# EAGLE board borrador_1 (EAGLE 9.5.2)

Size 200.33 x 299.71 mm. Coordinates in mm from the lower left corner, seen from the top.
Outline: 0,0 199.06,0 200.33,299.71 1.27,299.71 0,0
Copper layers (1*16): Top 0.035mm / dielectric 1.5mm / Bottom 0.035mm
Design rules "default": minimum track width 6mil, minimum drill 0.35mm, track to track 6mil, track to pad 6mil, pad to pad 6mil, via to via 6mil, smd to smd 6mil, copper to edge 40mil, drill to drill 6mil, minimum pad ring 10mil, minimum via ring 8mil, stop-mask expansion 4mil, vias tented up to drill 0mil, thermal gap 10mil

## Footprints (pad centres in the part's own frame; a part is rotated, then mirrored left to right if it is on the bottom)
DIP254P762X508-8 = drill 1.118 square: 1 -7.62,7.62 | drill 1.118: 2 -7.62,5.08; 3 -7.62,2.54; 4 -7.62,0; 5 0,0; 6 0,2.54; 7 0,5.08; 8 0,7.62
ESP32-DEVKITV1 = drill 1 pad 1.93: 3V3 0,0; D1 30.48,0; D2 7.62,0; D3 27.94,0; D4 10.16,0; D5 17.78,0; D12 7.62,25.4; D13 5.08,25.4; D14 10.16,25.4; D15 5.08,0; D16 12.7,0; D17 15.24,0; D18 20.32,0; D19 22.86,0; D21 25.4,0; D22 33.02,0; D23 35.56,0; D25 17.78,25.4; D26 15.24,25.4; D27 12.7,25.4; D32 22.86,25.4; D33 20.32,25.4; D34 27.94,25.4; D35 25.4,25.4; EN 35.56,25.4; GND 2.54,25.4; GND@1 2.54,0; VIN 0,25.4; VN 30.48,25.4; VP 33.02,25.4
SOT23 = smd 1 x 1.4: 1 -0.95,-1.1; 2 0.95,-1.1; 3 0,1.1
LED3MM = drill 0.813 pad 1.676 octagon: A -1.27,0 | drill 0.813 pad 1.676 square: K 1.27,0
MCP2515 = drill 0.813 long: 1 1.27,-6.35; 2 1.27,-3.81; 3 1.27,-1.27; 4 1.27,1.27; 5 1.27,3.81; 6 1.27,6.35; 7 1.27,8.89; 8 29.27,0; 9 29.27,2.54
ASUB27737TP25 = drill 1 pad 1.5: A1 49.86,0; A2 47.09,0; A3 44.32,0; A4 41.55,0; A5 38.78,0; A6 36.01,0; A7 33.24,0; A8 30.47,0; A9 27.7,0; A10 24.93,0; A11 22.16,0; A12 19.39,0; A13 16.62,0; A14 13.85,0; A15 11.08,0; A16 8.31,0; A17 5.54,0; A18 2.77,0; A19 0,0; A20 48.475,-2.84; A21 45.705,-2.84; A22 42.935,-2.84; A23 40.165,-2.84; A24 37.395,-2.84; A25 34.625,-2.84; A26 31.855,-2.84; A27 29.085,-2.84; A28 26.315,-2.84; A29 23.545,-2.84; A30 20.775,-2.84; A31 18.005,-2.84; A32 15.235,-2.84; A33 12.465,-2.84; A34 9.695,-2.84; A35 6.925,-2.84; A36 4.155,-2.84; A37 1.385,-2.84; B1 0,-6.8; B2 2.77,-6.8; B3 5.54,-6.8; B4 8.31,-6.8; B5 11.08,-6.8; B6 13.85,-6.8; B7 16.62,-6.8; B8 19.39,-6.8; B9 22.16,-6.8; B10 24.93,-6.8; B11 27.7,-6.8; B12 30.47,-6.8; B13 33.24,-6.8; B14 36.01,-6.8; B15 38.78,-6.8; B16 41.55,-6.8; B17 44.32,-6.8; B18 47.09,-6.8; B19 49.86,-6.8; B20 1.385,-9.64; B21 4.155,-9.64; B22 6.925,-9.64; B23 9.695,-9.64; B24 12.465,-9.64; B25 15.235,-9.64; B26 18.005,-9.64; B27 20.775,-9.64; B28 23.545,-9.64; B29 26.315,-9.64; B30 29.085,-9.64; B31 31.855,-9.64; B32 34.625,-9.64; B33 37.395,-9.64; B34 40.165,-9.64; B35 42.935,-9.64; B36 45.705,-9.64; B37 48.475,-9.64 | drill 3.2 pad 4.8: MH1 -6.82,-1.42; MH2 56.68,-1.42; MH3 -6.82,-9.32; MH4 56.68,-9.32
0207/10 = drill 0.813 octagon: 1 -5.08,0; 2 5.08,0
1X02 = drill 1.016 long: 1 -1.27,0; 2 1.27,0
M9040P = drill 1.803 long: 1 0,4.699; 2 0,0; 3 0,-4.699
N20 = drill 0.787 pad 1.295 square: 1 0,0 | drill 0.787 pad 1.295: 2 0,-2.54; 3 0,-5.08; 4 0,-7.62; 5 0,-10.16; 6 0,-12.7; 7 0,-15.24; 8 0,-17.78; 9 0,-20.32; 10 0,-22.86; 11 7.62,-22.86; 12 7.62,-20.32; 13 7.62,-17.78; 14 7.62,-15.24; 15 7.62,-12.7; 16 7.62,-10.16; 17 7.62,-7.62; 18 7.62,-5.08; 19 7.62,-2.54; 20 7.62,0
RASPI_GPIO_B+_BOX = drill 1 pad 1.778 square: 1 -24.13,-1.27 | drill 1 pad 1.778: 2 -24.13,1.27; 3 -21.59,-1.27; 4 -21.59,1.27; 5 -19.05,-1.27; 6 -19.05,1.27; 7 -16.51,-1.27; 8 -16.51,1.27; 9 -13.97,-1.27; 10 -13.97,1.27; 11 -11.43,-1.27; 12 -11.43,1.27; 13 -8.89,-1.27; 14 -8.89,1.27; 15 -6.35,-1.27; 16 -6.35,1.27; 17 -3.81,-1.27; 18 -3.81,1.27; 19 -1.27,-1.27; 20 -1.27,1.27; 21 1.27,-1.27; 22 1.27,1.27; 23 3.81,-1.27; 24 3.81,1.27; 25 6.35,-1.27; 26 6.35,1.27; 27 8.89,-1.27; 28 8.89,1.27; 29 11.43,-1.27; 30 11.43,1.27; 31 13.97,-1.27; 32 13.97,1.27; 33 16.51,-1.27; 34 16.51,1.27; 35 19.05,-1.27; 36 19.05,1.27; 37 21.59,-1.27; 38 21.59,1.27; 39 24.13,-1.27; 40 24.13,1.27
RASPI_BOARD_B+_FULL = hole 2.75: 3.5,3.5; 3.5,52.5; 61.5,3.5; 61.5,52.5

## Placement (x,y rotation side)
A0-A1  OPA2350PA  [DIP254P762X508-8]  -149.86,191.77 0 top  (outside the outline)
A2-A3  OPA2350PA  [DIP254P762X508-8]  -168.91,191.77 0 top  (outside the outline)
A4-A5  OPA2350PA  [DIP254P762X508-8]  -187.96,191.77 0 top  (outside the outline)
A6-A7  OPA2350PA  [DIP254P762X508-8]  -207.01,191.77 0 top  (outside the outline)
A8-A9  OPA2350PA  [DIP254P762X508-8]  -226.06,191.77 0 top  (outside the outline)
A10-A11  OPA2350PA  [DIP254P762X508-8]  -20.32,219.71 0 top  (outside the outline)
A12-A13  OPA2350PA  [DIP254P762X508-8]  -39.37,219.71 0 top  (outside the outline)
A14-A15  OPA2350PA  [DIP254P762X508-8]  -58.42,219.71 0 top  (outside the outline)
BOARD1  ESP32DEVKITV1  [ESP32-DEVKITV1]  73.66,109.22 180 top
BOARD2  ESP32DEVKITV1  [ESP32-DEVKITV1]  39.37,140.97 0 top
BOARD3  ESP32DEVKITV1  [ESP32-DEVKITV1]  39.37,194.31 0 top
BOARD4  ESP32DEVKITV1  [ESP32-DEVKITV1]  38.1,254 0 top
BOARD5  ESP32DEVKITV1  [ESP32-DEVKITV1]  -167.64,64.77 0 top  (outside the outline)
BOARD6  ESP32DEVKITV1  [ESP32-DEVKITV1]  -223.52,64.77 0 top  (outside the outline)
BOARD7  ESP32DEVKITV1  [ESP32-DEVKITV1]  -55.88,100.33 0 top  (outside the outline)
BOARD8  ESP32DEVKITV1  [ESP32-DEVKITV1]  -111.76,100.33 0 top  (outside the outline)
BOARD9  ESP32DEVKITV1  [ESP32-DEVKITV1]  57.15,24.13 0 top
D1  BAT54S  [SOT23]  -99.06,236.22 0 top  (outside the outline)
D2  BAT54S  [SOT23]  -106.68,236.22 0 top  (outside the outline)
D3  BAT54S  [SOT23]  -114.3,236.22 0 top  (outside the outline)
D4  BAT54S  [SOT23]  -121.92,236.22 0 top  (outside the outline)
D5  BAT54S  [SOT23]  -129.54,236.22 0 top  (outside the outline)
D6  BAT54S  [SOT23]  -137.16,236.22 0 top  (outside the outline)
D7  BAT54S  [SOT23]  -144.78,236.22 0 top  (outside the outline)
D8  BAT54S  [SOT23]  -152.4,236.22 0 top  (outside the outline)
D9  BAT54S  [SOT23]  -160.02,236.22 0 top  (outside the outline)
D10  BAT54S  [SOT23]  -167.64,236.22 0 top  (outside the outline)
D11  BAT54S  [SOT23]  -175.26,236.22 0 top  (outside the outline)
D12  BAT54S  [SOT23]  -182.88,236.22 0 top  (outside the outline)
D13  BAT54S  [SOT23]  -190.5,236.22 0 top  (outside the outline)
D14  BAT54S  [SOT23]  -198.12,236.22 0 top  (outside the outline)
D15  BAT54S  [SOT23]  -205.74,236.22 0 top  (outside the outline)
D16  BAT54S  [SOT23]  -213.36,236.22 0 top  (outside the outline)
LD1_MOD1  [LED3MM]  -138.43,252.73 0 top  (outside the outline)
LD1_MOD2  [LED3MM]  -153.67,252.73 0 top  (outside the outline)
LD1_MOD3  [LED3MM]  -168.91,252.73 0 top  (outside the outline)
LD1_MOD4  [LED3MM]  -184.15,252.73 0 top  (outside the outline)
LD1_MOD5  [LED3MM]  -199.39,252.73 0 top  (outside the outline)
LD1_MOD6  [LED3MM]  -214.63,252.73 0 top  (outside the outline)
LD1_MOD7  [LED3MM]  -229.87,252.73 0 top  (outside the outline)
LD1_MOD8  [LED3MM]  -25.4,259.08 0 top  (outside the outline)
LD1_MOD9  [LED3MM]  -40.64,259.08 0 top  (outside the outline)
LD2_MOD1  [LED3MM]  -55.88,259.08 0 top  (outside the outline)
LD2_MOD2  [LED3MM]  -71.12,259.08 0 top  (outside the outline)
LD2_MOD3  [LED3MM]  -86.36,259.08 0 top  (outside the outline)
LD2_MOD4  [LED3MM]  -101.6,259.08 0 top  (outside the outline)
LD2_MOD5  [LED3MM]  -116.84,259.08 0 top  (outside the outline)
LD2_MOD6  [LED3MM]  -132.08,259.08 0 top  (outside the outline)
LD2_MOD7  [LED3MM]  -147.32,259.08 0 top  (outside the outline)
LD2_MOD8  [LED3MM]  -162.56,259.08 0 top  (outside the outline)
LD2_MOD9  [LED3MM]  -177.8,259.08 0 top  (outside the outline)
LD3_MOD1  [LED3MM]  -193.04,259.08 0 top  (outside the outline)
LD3_MOD2  [LED3MM]  -208.28,259.08 0 top  (outside the outline)
LD3_MOD3  [LED3MM]  -223.52,259.08 0 top  (outside the outline)
LD3_MOD4  [LED3MM]  -25.4,265.43 0 top  (outside the outline)
LD3_MOD5  [LED3MM]  -40.64,265.43 0 top  (outside the outline)
LD3_MOD6  [LED3MM]  -55.88,265.43 0 top  (outside the outline)
LD3_MOD7  [LED3MM]  -71.12,265.43 0 top  (outside the outline)
LD3_MOD8  [LED3MM]  -86.36,265.43 0 top  (outside the outline)
LD3_MOD9  [LED3MM]  -101.6,265.43 0 top  (outside the outline)
MCP2515_MOD1  [MCP2515]  -198.12,143.51 0 top  (outside the outline)
MCP2515_MOD2  [MCP2515]  -53.34,171.45 0 top  (outside the outline)
MCP2515_MOD3  [MCP2515]  -96.52,171.45 0 top  (outside the outline)
MCP2515_MOD4  [MCP2515]  -139.7,171.45 0 top  (outside the outline)
MCP2515_MOD5  [MCP2515]  -182.88,171.45 0 top  (outside the outline)
MCP2515_MOD6  [MCP2515]  -226.06,171.45 0 top  (outside the outline)
MCP2515_MOD7  [MCP2515]  -53.34,199.39 0 top  (outside the outline)
MCP2515_MOD8  [MCP2515]  -96.52,199.39 0 top  (outside the outline)
MCP2515_MOD9  [MCP2515]  -139.7,199.39 0 top  (outside the outline)
PORT-DIGITAL  ASUB-277-37TP25  [ASUB27737TP25]  16.51,223.52 270 top
PORT_ANALOG  ASUB-277-37TP25  [ASUB27737TP25]  16.51,147.32 270 top
R3  [0207/10]  -110.49,264.16 0 top  (outside the outline)
R4  [0207/10]  -123.19,264.16 0 top  (outside the outline)
R5  [0207/10]  -135.89,264.16 0 top  (outside the outline)
R6  [0207/10]  -148.59,264.16 0 top  (outside the outline)
R7  [0207/10]  -161.29,264.16 0 top  (outside the outline)
R8  [0207/10]  -173.99,264.16 0 top  (outside the outline)
R9  [0207/10]  -186.69,264.16 0 top  (outside the outline)
R10  [0207/10]  -199.39,264.16 0 top  (outside the outline)
R11  [0207/10]  -212.09,264.16 0 top  (outside the outline)
R12  [0207/10]  -224.79,264.16 0 top  (outside the outline)
R13  [0207/10]  -19.05,270.51 0 top  (outside the outline)
R14  [0207/10]  -31.75,270.51 0 top  (outside the outline)
R15  [0207/10]  -44.45,270.51 0 top  (outside the outline)
R16  [0207/10]  -57.15,270.51 0 top  (outside the outline)
R17  [0207/10]  -69.85,270.51 0 top  (outside the outline)
R18  [0207/10]  -82.55,270.51 0 top  (outside the outline)
R19  [0207/10]  -95.25,270.51 0 top  (outside the outline)
R20  [0207/10]  -107.95,270.51 0 top  (outside the outline)
R21  [0207/10]  -120.65,270.51 0 top  (outside the outline)
R22  [0207/10]  -133.35,270.51 0 top  (outside the outline)
R23  [0207/10]  -146.05,270.51 0 top  (outside the outline)
R24  [0207/10]  -158.75,270.51 0 top  (outside the outline)
R25  [0207/10]  -171.45,270.51 0 top  (outside the outline)
R26  [0207/10]  -184.15,270.51 0 top  (outside the outline)
R27  [0207/10]  -196.85,270.51 0 top  (outside the outline)
R28  [0207/10]  -209.55,270.51 0 top  (outside the outline)
R29  [0207/10]  -222.25,270.51 0 top  (outside the outline)
SERIAL_MOD1  [1X02]  -227.33,234.95 0 top  (outside the outline)
SERIAL_MOD2  [1X02]  -24.13,252.73 0 top  (outside the outline)
SERIAL_MOD3  [1X02]  -38.1,252.73 0 top  (outside the outline)
SERIAL_MOD4  [1X02]  -52.07,252.73 0 top  (outside the outline)
SERIAL_MOD5  [1X02]  -66.04,252.73 0 top  (outside the outline)
SERIAL_MOD6  [1X02]  -80.01,252.73 0 top  (outside the outline)
SERIAL_MOD7  [1X02]  -93.98,252.73 0 top  (outside the outline)
SERIAL_MOD8  [1X02]  -107.95,252.73 0 top  (outside the outline)
SERIAL_MOD9  [1X02]  -121.92,252.73 0 top  (outside the outline)
SWITCH_MOD1  [M9040P]  -85.09,220.98 0 top  (outside the outline)
SWITCH_MOD2  [M9040P]  -105.41,220.98 0 top  (outside the outline)
SWITCH_MOD3  [M9040P]  -125.73,220.98 0 top  (outside the outline)
SWITCH_MOD4  [M9040P]  -146.05,220.98 0 top  (outside the outline)
SWITCH_MOD5  [M9040P]  -166.37,220.98 0 top  (outside the outline)
SWITCH_MOD6  [M9040P]  -186.69,220.98 0 top  (outside the outline)
SWITCH_MOD7  [M9040P]  -207.01,220.98 0 top  (outside the outline)
SWITCH_MOD8  [M9040P]  -227.33,220.98 0 top  (outside the outline)
SWITCH_MOD9  [M9040P]  -29.21,240.03 0 top  (outside the outline)
U2  SN74LVC245AN  [N20]  -196.85,120.65 0 top  (outside the outline)
U4  SN74LVC245AN  [N20]  -214.63,120.65 0 top  (outside the outline)
X1  RASPI_GPIO_B+_BOX  [RASPI_GPIO_B+_BOX]  143.51,68.58 0 top
X2  RASPI_BOARD_B+#_F  [RASPI_BOARD_B+_FULL]  110.49,2.54 0 top

## Library data of the parts
A0-A1 A2-A3 A4-A5 A6-A7 A8-A9 A10-A11 A12-A13 A14-A15 = Texas Instruments_By_element14_Batch_1; MPN: OPA2350PA; OC_FARNELL: 4353316; OC_NEWARK: 75C4730; PACKAGE: PDIP; SUPPLIER: Texas Instruments
BOARD1-BOARD9 = ESP32-DEVKITV1
D1-D16 = diode
LD1_MOD1-LD1_MOD9 LD2_MOD1-LD2_MOD9 LD3_MOD1-LD3_MOD9 = led
MCP2515_MOD1-MCP2515_MOD9 = mcp2515; OC_FARNELL: unknown; OC_NEWARK: unknown
PORT-DIGITAL PORT_ANALOG = ASUB-277-37TP25; DESCRIPTION: CONN D-SUB PLUG/RCPT 37P R/A SLD; HEIGHT: 31.55mm; MANUFACTURER_NAME: ASSMANN WSW components GmbH; MANUFACTURER_PART_NUMBER: ASUB-277-37TP25
R3-R29 = resistor
SERIAL_MOD1-SERIAL_MOD9 = pinhead
SWITCH_MOD1-SWITCH_MOD9 = switch
U2 U4 = lc245a; DATASHEET_URL: http://www.ti.com/lit/gpn/SN74LVC245A; DESCRIPTION: Octal Bus Transceiver With 3-State Outputs; FAMILY_NAME: STANDARD TRANSCEIVER; GENERIC_PART_NUMBER: SN74LVC245A; INDUSTRY_STD_PKG_TYPE: PDIP; MANUFACTURER: Texas Instruments; MANUFACTURER_PART_NUMBER: SN74LVC245AN; PACKAGE_DESIGNATOR: N; PIN_COUNT: 20; VENDOR: Texas Instruments
X1 = raspberrypi_bastelstube_v13
X2 = Rasp_board

## Nets
3V3: X1.1
5V0: X1.2
5V_MOD1: BOARD1.VIN SWITCH_MOD1.2
5V_MOD2: BOARD2.VIN SWITCH_MOD2.2
5V_MOD3: BOARD3.VIN SWITCH_MOD3.2
5V_MOD4: BOARD4.VIN SWITCH_MOD4.2
5V_MOD5: BOARD5.VIN SWITCH_MOD5.2
5V_MOD6: BOARD6.VIN SWITCH_MOD6.2
5V_MOD7: BOARD7.VIN SWITCH_MOD7.2
5V_MOD8: BOARD8.VIN SWITCH_MOD8.2
5V_MOD9: BOARD9.VIN SWITCH_MOD9.2
CAN_H: MCP2515_MOD1.9 MCP2515_MOD2.9 MCP2515_MOD3.9 MCP2515_MOD4.9 MCP2515_MOD5.9 MCP2515_MOD6.9 MCP2515_MOD7.9 MCP2515_MOD8.9 MCP2515_MOD9.9
CAN_L: MCP2515_MOD1.8 MCP2515_MOD2.8 MCP2515_MOD3.8 MCP2515_MOD4.8 MCP2515_MOD5.8 MCP2515_MOD6.8 MCP2515_MOD7.8 MCP2515_MOD8.8 MCP2515_MOD9.8
GND_MOD1: BOARD1.GND@1 LD1_MOD1.K LD2_MOD1.K LD3_MOD1.K MCP2515_MOD1.2
GND_MOD2: BOARD2.GND@1 LD1_MOD2.K LD2_MOD2.K LD3_MOD2.K MCP2515_MOD2.2
GND_MOD3: BOARD3.GND@1 LD1_MOD3.K LD2_MOD3.K LD3_MOD3.K MCP2515_MOD3.2
GND_MOD4: BOARD4.GND@1 LD1_MOD4.K LD2_MOD4.K LD3_MOD4.K MCP2515_MOD4.2
GND_MOD5: BOARD5.GND@1 LD1_MOD5.K LD2_MOD5.K LD3_MOD5.K MCP2515_MOD5.2
GND_MOD6: BOARD6.GND@1 LD1_MOD6.K LD2_MOD6.K LD3_MOD6.K MCP2515_MOD6.2
GND_MOD7: BOARD7.GND@1 LD1_MOD7.K LD2_MOD7.K LD3_MOD7.K MCP2515_MOD7.2
GND_MOD8: BOARD8.GND@1 LD1_MOD8.K LD2_MOD8.K LD3_MOD8.K MCP2515_MOD8.2
GND_MOD9: BOARD9.GND@1 LD1_MOD9.K LD2_MOD9.K LD3_MOD9.K MCP2515_MOD9.2
L_3V3: A0-A1.8 A2-A3.8 A4-A5.8 A6-A7.8 A8-A9.8 A10-A11.8 A12-A13.8 A14-A15.8 D1.2 D2.2 D3.2 D4.2 D5.2 D6.2 D7.2 D8.2 D9.2 D10.2 D11.2 D12.2 D13.2 D14.2 D15.2 D16.2 PORT-DIGITAL.A19 U2.1 U2.20 U4.1 U4.20
L_AO_0: A0-A1.1 BOARD1.D34 D1.3
L_AO_0_P: A0-A1.3 PORT_ANALOG.B1
L_AO_1: A0-A1.7 BOARD1.D35 D2.3
L_AO_1_P: A0-A1.5 PORT_ANALOG.B2
L_AO_2: A2-A3.1 BOARD2.D34 D3.3
L_AO_2_P: A2-A3.3 PORT_ANALOG.B3
L_AO_3: A2-A3.7 BOARD2.D35 D4.3
L_AO_3_P: A2-A3.5 PORT_ANALOG.B4
L_AO_4: A4-A5.1 BOARD3.D34 D5.3
L_AO_4_P: A4-A5.3 PORT_ANALOG.B5
L_AO_5: A4-A5.7 BOARD3.D35 D6.3
L_AO_5_P: A4-A5.5 PORT_ANALOG.B6
L_AO_6: A6-A7.1 BOARD4.D34 D7.3
L_AO_6_P: A6-A7.3 PORT_ANALOG.B7
L_AO_7: A6-A7.7 BOARD4.D35 D8.3
L_AO_7_P: A6-A7.5 PORT_ANALOG.B8
L_AO_8: A8-A9.1 BOARD5.D34 D9.3
L_AO_8_P: A8-A9.3 PORT_ANALOG.B9
L_AO_9: A8-A9.7 BOARD5.D35 D10.3
L_AO_9_P: A8-A9.5 PORT_ANALOG.B10
L_AO_10: A10-A11.1 BOARD6.D34 D11.3
L_AO_10_P: A10-A11.3 PORT_ANALOG.B11
L_AO_11: A10-A11.7 BOARD6.D35 D12.3
L_AO_11_P: A10-A11.5 PORT_ANALOG.B12
L_AO_12: A12-A13.1 BOARD7.D34 D13.3
L_AO_12_P: A12-A13.3 PORT_ANALOG.B13
L_AO_13: A12-A13.7 BOARD7.D35 D14.3
L_AO_13_P: A12-A13.5 PORT_ANALOG.B14
L_AO_14: A14-A15.1 BOARD8.D34 D15.3
L_AO_14_P: A14-A15.3 PORT_ANALOG.B15
L_AO_15: A14-A15.7 BOARD8.D35 D16.3
L_AO_15_P: A14-A15.5 PORT_ANALOG.B16
L_DI_0: BOARD1.D12 U4.2
L_DI_0_P: PORT-DIGITAL.A1 U4.18
L_DI_1: BOARD1.D14 U2.2
L_DI_1_P: PORT-DIGITAL.A20 U2.18
L_DI_2: BOARD2.D12 U4.3
L_DI_2_P: PORT-DIGITAL.A2 U4.17
L_DI_3: BOARD2.D14 U2.3
L_DI_3_P: PORT-DIGITAL.A21 U2.17
L_DI_4: BOARD3.D12 U4.4
L_DI_4_P: PORT-DIGITAL.A3 U4.16
L_DI_5: BOARD3.D14 U2.4
L_DI_5_P: PORT-DIGITAL.A22 U2.16
L_DI_6: BOARD4.D12 U4.5
L_DI_6_P: PORT-DIGITAL.A4 U4.15
L_DI_7: BOARD4.D14 U2.5
L_DI_7_P: PORT-DIGITAL.A23 U2.15
L_DI_8: BOARD5.D12 U2.6
L_DI_8_P: PORT-DIGITAL.A24 U2.14
L_DI_9: BOARD5.D14 U4.6
L_DI_9_P: PORT-DIGITAL.A6 U4.14
L_DI_10: BOARD6.D12 U2.7
L_DI_10_P: PORT-DIGITAL.A25 U2.13
L_DI_11: BOARD6.D14 U4.7
L_DI_11_P: PORT-DIGITAL.A7 U4.13
L_DI_012: BOARD7.D12 U2.8
L_DI_12_P: PORT-DIGITAL.A26 U2.12
L_DI_13: BOARD7.D14 U4.8
L_DI_13_P: PORT-DIGITAL.A8 U4.12
L_DI_014: BOARD8.D12 U2.9
L_DI_14_P: PORT-DIGITAL.A27 U2.11
L_DI_015: BOARD8.D14 U4.9
L_DI_15_P: PORT-DIGITAL.A9 U4.11
L_GROUND: A0-A1.2 A0-A1.4 A0-A1.6 A2-A3.2 A2-A3.4 A2-A3.6 A4-A5.2 A4-A5.4 A4-A5.6 A6-A7.2 A6-A7.4 A6-A7.6 A8-A9.2 A8-A9.4 A8-A9.6 A10-A11.2 A10-A11.4 A10-A11.6 A12-A13.2 A12-A13.4 A12-A13.6 A14-A15.2 A14-A15.4 A14-A15.6 BOARD1.GND BOARD2.GND BOARD3.GND BOARD4.GND BOARD5.GND BOARD6.GND BOARD7.GND BOARD8.GND BOARD9.GND D1.1 D2.1 D3.1 D4.1 D5.1 D6.1 D7.1 D8.1 D9.1 D10.1 D11.1 D12.1 D13.1 D14.1 D15.1 D16.1 PORT-DIGITAL.A5 PORT-DIGITAL.A14 PORT-DIGITAL.A28 PORT-DIGITAL.A37 PORT_ANALOG.B20 PORT_ANALOG.B21 PORT_ANALOG.B22 PORT_ANALOG.B23 PORT_ANALOG.B24 PORT_ANALOG.B25 PORT_ANALOG.B26 PORT_ANALOG.B27 PORT_ANALOG.B28 PORT_ANALOG.B29 PORT_ANALOG.B30 PORT_ANALOG.B31 PORT_ANALOG.B32 PORT_ANALOG.B33 PORT_ANALOG.B34 PORT_ANALOG.B35 PORT_ANALOG.B37 U2.10 U2.19 U4.10 U4.19 X1.6
L_SCL: BOARD1.D22 BOARD2.D22 BOARD3.D22 BOARD4.D22 BOARD5.D22 BOARD6.D22 BOARD7.D22 BOARD8.D22 BOARD9.D22
L_SDA: BOARD1.D21 BOARD2.D21 BOARD3.D21 BOARD4.D21 BOARD5.D21 BOARD6.D21 BOARD7.D21 BOARD8.D21 BOARD9.D21
N$1: BOARD2.D1 SERIAL_MOD2.1
N$2: BOARD7.3V3 MCP2515_MOD7.1
N$3: BOARD2.D3 SERIAL_MOD2.2
N$4: BOARD3.D1 SERIAL_MOD3.1
N$5: BOARD3.D3 SERIAL_MOD3.2
N$6: BOARD9.D23 MCP2515_MOD9.5
N$7: BOARD9.D19 MCP2515_MOD9.4
N$8: BOARD9.D1 SERIAL_MOD9.1
N$9: BOARD9.D3 SERIAL_MOD9.2
N$10: BOARD1.D1 SERIAL_MOD1.1
N$11: BOARD1.D3 SERIAL_MOD1.2
N$12: BOARD5.D1 SERIAL_MOD5.1
N$13: BOARD5.D3 SERIAL_MOD5.2
N$14: BOARD4.D1 SERIAL_MOD4.1
N$15: BOARD4.D3 SERIAL_MOD4.2
N$16: BOARD6.D1 SERIAL_MOD6.1
N$17: BOARD6.D3 SERIAL_MOD6.2
N$18: BOARD7.D1 SERIAL_MOD7.1
N$19: BOARD7.D3 SERIAL_MOD7.2
N$20: BOARD8.D1 SERIAL_MOD8.1
N$21: BOARD8.D3 SERIAL_MOD8.2
N$22: BOARD1.D23 MCP2515_MOD1.5
N$23: BOARD1.D19 MCP2515_MOD1.4
N$24: BOARD1.D18 MCP2515_MOD1.6
N$25: BOARD1.3V3 MCP2515_MOD1.1
N$27: BOARD9.3V3 MCP2515_MOD9.1
N$28: BOARD9.D18 MCP2515_MOD9.6
N$29: BOARD9.D2 MCP2515_MOD9.3
N$30: LD1_MOD2.A R6.2
N$31: BOARD1.D2 MCP2515_MOD1.3
N$32: BOARD2.D18 MCP2515_MOD2.6
N$33: BOARD2.D23 MCP2515_MOD2.5
N$34: BOARD2.D19 MCP2515_MOD2.4
N$35: BOARD2.3V3 MCP2515_MOD2.1
N$36: LD1_MOD4.A R12.2
N$37: BOARD2.D2 MCP2515_MOD2.3
N$38: BOARD3.D23 MCP2515_MOD3.5
N$39: BOARD3.D18 MCP2515_MOD3.6
N$40: BOARD3.D19 MCP2515_MOD3.4
N$41: BOARD3.3V3 MCP2515_MOD3.1
N$42: LD2_MOD4.A R13.2
N$43: BOARD3.D2 MCP2515_MOD3.3
N$44: BOARD4.D18 MCP2515_MOD4.6
N$45: BOARD4.D23 MCP2515_MOD4.5
N$46: BOARD4.D19 MCP2515_MOD4.4
N$47: BOARD4.3V3 MCP2515_MOD4.1
N$48: BOARD4.D27 R14.1
N$49: BOARD4.D2 MCP2515_MOD4.3
N$50: SWITCH_MOD1.3 SWITCH_MOD2.3 SWITCH_MOD3.3 SWITCH_MOD4.3 SWITCH_MOD5.3 SWITCH_MOD6.3 SWITCH_MOD7.3 SWITCH_MOD8.3 SWITCH_MOD9.3
N$51: LD1_MOD1.A R3.2
N$52: BOARD5.D18 MCP2515_MOD5.6
N$53: BOARD5.D23 MCP2515_MOD5.5
N$54: BOARD5.D19 MCP2515_MOD5.4
N$55: BOARD5.3V3 MCP2515_MOD5.1
N$56: LD1_MOD9.A R27.2
N$57: BOARD5.D2 MCP2515_MOD5.3
N$58: BOARD6.D18 MCP2515_MOD6.6
N$59: BOARD6.D23 MCP2515_MOD6.5
N$60: BOARD6.D19 MCP2515_MOD6.4
N$61: BOARD6.3V3 MCP2515_MOD6.1
N$62: LD2_MOD9.A R28.2
N$63: BOARD6.D2 MCP2515_MOD6.3
N$64: BOARD7.D18 MCP2515_MOD7.6
N$65: BOARD7.D23 MCP2515_MOD7.5
N$66: BOARD7.D19 MCP2515_MOD7.4
N$67: LD3_MOD9.A R29.2
N$68: BOARD7.D2 MCP2515_MOD7.3
N$69: BOARD8.D18 MCP2515_MOD8.6
N$70: BOARD8.D23 MCP2515_MOD8.5
N$71: BOARD8.D19 MCP2515_MOD8.4
N$72: BOARD8.3V3 MCP2515_MOD8.1
N$73: BOARD9.D27 R29.1
N$74: BOARD8.D2 MCP2515_MOD8.3
N$75: LD2_MOD1.A R4.2
N$76: LD3_MOD1.A R5.2
N$77: BOARD1.D27 R5.1
N$78: BOARD1.D26 R4.1
N$79: BOARD1.D25 R3.1
N$80: LD2_MOD2.A R7.2
N$81: LD3_MOD2.A R8.2
N$82: BOARD2.D27 R8.1
N$83: BOARD2.D26 R7.1
N$84: BOARD2.D25 R6.1
N$85: LD1_MOD3.A R9.2
N$86: LD2_MOD3.A R10.2
N$87: LD3_MOD3.A R11.2
N$88: LD3_MOD4.A R14.2
N$89: BOARD4.D26 R13.1
N$90: BOARD4.D25 R12.1
N$91: BOARD3.D27 R11.1
N$92: BOARD3.D26 R10.1
N$93: BOARD3.D25 R9.1
N$94: LD1_MOD5.A R15.2
N$95: LD2_MOD5.A R16.2
N$96: LD3_MOD5.A R17.2
N$97: BOARD5.D27 R17.1
N$98: BOARD5.D26 R16.1
N$99: BOARD5.D25 R15.1
N$100: LD1_MOD6.A R18.2
N$101: LD2_MOD6.A R19.2
N$102: LD3_MOD6.A R20.2
N$103: BOARD6.D27 R20.1
N$104: BOARD6.D26 R19.1
N$105: BOARD6.D25 R18.1
N$106: LD1_MOD7.A R21.2
N$107: LD2_MOD7.A R22.2
N$108: LD3_MOD7.A R23.2
N$109: BOARD7.D27 R23.1
N$110: BOARD7.D26 R22.1
N$111: BOARD7.D25 R21.1
N$112: LD1_MOD8.A R24.2
N$113: LD2_MOD8.A R25.2
N$114: LD3_MOD8.A R26.2
N$115: BOARD8.D27 R26.1
N$116: BOARD8.D26 R25.1
N$117: BOARD8.D25 R24.1
N$118: BOARD9.D26 R28.1
N$119: BOARD9.D25 R27.1

## Tracks (layer width: path | path; a pad name or v marks a point on that pad's centre or on a via)
5V_MOD1  (1 unrouted)
5V_MOD2  (1 unrouted)
5V_MOD3  (1 unrouted)
5V_MOD4  (1 unrouted)
5V_MOD5  (1 unrouted)
5V_MOD6  (1 unrouted)
5V_MOD7  (1 unrouted)
5V_MOD8  (1 unrouted)
5V_MOD9  (1 unrouted)
CAN_H  (8 unrouted)
CAN_L  (8 unrouted)
GND_MOD1  (4 unrouted)
GND_MOD2  (4 unrouted)
GND_MOD3  (4 unrouted)
GND_MOD4  (4 unrouted)
GND_MOD5  (4 unrouted)
GND_MOD6  (4 unrouted)
GND_MOD7  (4 unrouted)
GND_MOD8  (4 unrouted)
GND_MOD9  (4 unrouted)
L_3V3  (28 unrouted)
L_AO_0  (2 unrouted)
L_AO_0_P  (1 unrouted)
L_AO_1  (2 unrouted)
L_AO_1_P  (1 unrouted)
L_AO_2  (2 unrouted)
L_AO_2_P  (1 unrouted)
L_AO_3  (2 unrouted)
L_AO_3_P  (1 unrouted)
L_AO_4  (2 unrouted)
L_AO_4_P  (1 unrouted)
L_AO_5  (2 unrouted)
L_AO_5_P  (1 unrouted)
L_AO_6  (2 unrouted)
L_AO_6_P  (1 unrouted)
L_AO_7  (2 unrouted)
L_AO_7_P  (1 unrouted)
L_AO_8  (2 unrouted)
L_AO_8_P  (1 unrouted)
L_AO_9  (2 unrouted)
L_AO_9_P  (1 unrouted)
L_AO_10  (2 unrouted)
L_AO_10_P  (1 unrouted)
L_AO_11  (2 unrouted)
L_AO_11_P  (1 unrouted)
L_AO_12  (2 unrouted)
L_AO_12_P  (1 unrouted)
L_AO_13  (2 unrouted)
L_AO_13_P  (1 unrouted)
L_AO_14  (2 unrouted)
L_AO_14_P  (1 unrouted)
L_AO_15  (2 unrouted)
L_AO_15_P  (1 unrouted)
L_DI_0  (1 unrouted)
L_DI_0_P  (1 unrouted)
L_DI_1  (1 unrouted)
L_DI_1_P  (1 unrouted)
L_DI_2  (1 unrouted)
L_DI_2_P  (1 unrouted)
L_DI_3  (1 unrouted)
L_DI_3_P  (1 unrouted)
L_DI_4  (1 unrouted)
L_DI_4_P  (1 unrouted)
L_DI_5  (1 unrouted)
L_DI_5_P  (1 unrouted)
L_DI_6  (1 unrouted)
L_DI_6_P  (1 unrouted)
L_DI_7  (1 unrouted)
L_DI_7_P  (1 unrouted)
L_DI_8  (1 unrouted)
L_DI_8_P  (1 unrouted)
L_DI_9  (1 unrouted)
L_DI_9_P  (1 unrouted)
L_DI_10  (1 unrouted)
L_DI_10_P  (1 unrouted)
L_DI_11  (1 unrouted)
L_DI_11_P  (1 unrouted)
L_DI_012  (1 unrouted)
L_DI_12_P  (1 unrouted)
L_DI_13  (1 unrouted)
L_DI_13_P  (1 unrouted)
L_DI_014  (1 unrouted)
L_DI_14_P  (1 unrouted)
L_DI_015  (1 unrouted)
L_DI_15_P  (1 unrouted)
L_GROUND  (74 unrouted)
L_SCL  (8 unrouted)
L_SDA  (8 unrouted)
N$1  (1 unrouted)
N$2  (1 unrouted)
N$3  (1 unrouted)
N$4  (1 unrouted)
N$5  (1 unrouted)
N$6  (1 unrouted)
N$7  (1 unrouted)
N$8  (1 unrouted)
N$9  (1 unrouted)
N$10  (1 unrouted)
N$11  (1 unrouted)
N$12  (1 unrouted)
N$13  (1 unrouted)
N$14  (1 unrouted)
N$15  (1 unrouted)
N$16  (1 unrouted)
N$17  (1 unrouted)
N$18  (1 unrouted)
N$19  (1 unrouted)
N$20  (1 unrouted)
N$21  (1 unrouted)
N$22  (1 unrouted)
N$23  (1 unrouted)
N$24  (1 unrouted)
N$25  (1 unrouted)
N$27  (1 unrouted)
N$28  (1 unrouted)
N$29  (1 unrouted)
N$30  (1 unrouted)
N$31  (1 unrouted)
N$32  (1 unrouted)
N$33  (1 unrouted)
N$34  (1 unrouted)
N$35  (1 unrouted)
N$36  (1 unrouted)
N$37  (1 unrouted)
N$38  (1 unrouted)
N$39  (1 unrouted)
N$40  (1 unrouted)
N$41  (1 unrouted)
N$42  (1 unrouted)
N$43  (1 unrouted)
N$44  (1 unrouted)
N$45  (1 unrouted)
N$46  (1 unrouted)
N$47  (1 unrouted)
N$48  (1 unrouted)
N$49  (1 unrouted)
N$50  (8 unrouted)
N$51  (1 unrouted)
N$52  (1 unrouted)
N$53  (1 unrouted)
N$54  (1 unrouted)
N$55  (1 unrouted)
N$56  (1 unrouted)
N$57  (1 unrouted)
N$58  (1 unrouted)
N$59  (1 unrouted)
N$60  (1 unrouted)
N$61  (1 unrouted)
N$62  (1 unrouted)
N$63  (1 unrouted)
N$64  (1 unrouted)
N$65  (1 unrouted)
N$66  (1 unrouted)
N$67  (1 unrouted)
N$68  (1 unrouted)
N$69  (1 unrouted)
N$70  (1 unrouted)
N$71  (1 unrouted)
N$72  (1 unrouted)
N$73  (1 unrouted)
N$74  (1 unrouted)
N$75  (1 unrouted)
N$76  (1 unrouted)
N$77  (1 unrouted)
N$78  (1 unrouted)
N$79  (1 unrouted)
N$80  (1 unrouted)
N$81  (1 unrouted)
N$82  (1 unrouted)
N$83  (1 unrouted)
N$84  (1 unrouted)
N$85  (1 unrouted)
N$86  (1 unrouted)
N$87  (1 unrouted)
N$88  (1 unrouted)
N$89  (1 unrouted)
N$90  (1 unrouted)
N$91  (1 unrouted)
N$92  (1 unrouted)
N$93  (1 unrouted)
N$94  (1 unrouted)
N$95  (1 unrouted)
N$96  (1 unrouted)
N$97  (1 unrouted)
N$98  (1 unrouted)
N$99  (1 unrouted)
N$100  (1 unrouted)
N$101  (1 unrouted)
N$102  (1 unrouted)
N$103  (1 unrouted)
N$104  (1 unrouted)
N$105  (1 unrouted)
N$106  (1 unrouted)
N$107  (1 unrouted)
N$108  (1 unrouted)
N$109  (1 unrouted)
N$110  (1 unrouted)
N$111  (1 unrouted)
N$112  (1 unrouted)
N$113  (1 unrouted)
N$114  (1 unrouted)
N$115  (1 unrouted)
N$116  (1 unrouted)
N$117  (1 unrouted)
N$118  (1 unrouted)
N$119  (1 unrouted)
(copper drawn outside any net)
  shapes: Top area x2